# EAGLE board STorM32 NT Display v13 (EAGLE 7.5.0)
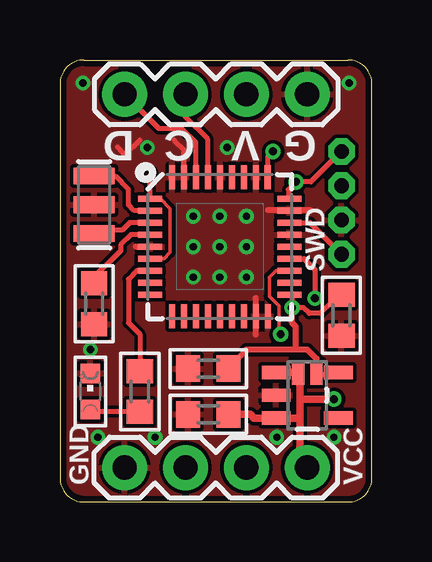
[diagram p0: board, top side]
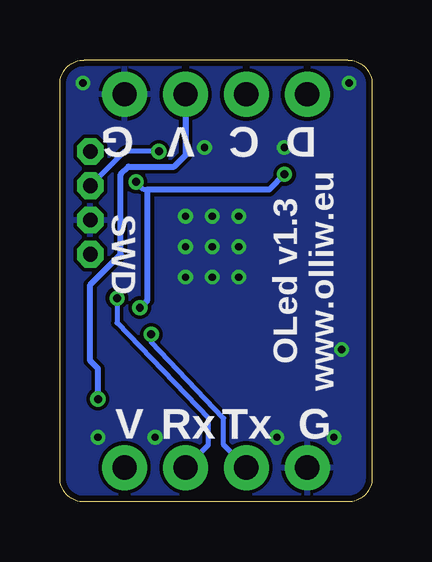
[diagram p1: board, bottom side, seen from below]

Size 13.02 x 18.41 mm. Coordinates in mm from the lower left corner, seen from the top.
Outline: 1,18.41 12.02,18.41 arc-90 13.02,17.41 13.02,1 arc-90 12.02,0 1,0 arc-90 0,1 0,17.41 arc-90 1,18.41
Copper layers (1*16): Top 0.035mm / dielectric 1.5mm / Bottom 0.035mm
Design rules "Fusion_eagle_rule_v1.1-shapes-supply-changed": minimum track width 6mil, minimum drill 12mil, track to track 6mil, track to pad 6mil, pad to pad 6mil, via to via 6mil, smd to smd 0mil, copper to edge 10mil, drill to drill 10mil, minimum pad ring 10mil, minimum via ring 6mil, stop-mask expansion 2mil, vias tented up to drill 100mil, thermal gap 6mil

## Footprints (pad centres in the part's own frame; a part is rotated, then mirrored left to right if it is on the bottom)
C0603 = smd 1 x 1.1: 1 -0.85,0; 2 0.85,0
VFQFPN36 = smd 1 x 0.25: 1 -2.9,2; 2 -2.9,1.5; 3 -2.9,1; 4 -2.9,0.5; 5 -2.9,0; 6 -2.9,-0.5; 7 -2.9,-1; 8 -2.9,-1.5; 9 -2.9,-2; 19 2.9,-2; 20 2.9,-1.5; 21 2.9,-1; 22 2.9,-0.5; 23 2.9,0; 24 2.9,0.5; 25 2.9,1; 26 2.9,1.5; 27 2.9,2 | smd 0.25 x 1: 10 -2,-2.9; 11 -1.5,-2.9; 12 -1,-2.9; 13 -0.5,-2.9; 14 0,-2.9; 15 0.5,-2.9; 16 1,-2.9; 17 1.5,-2.9; 18 2,-2.9; 29 1.5,2.9; 30 1,2.9; 31 0.5,2.9; 32 0,2.9; 33 -0.5,2.9; 34 -1,2.9; 35 -1.5,2.9; 36 -2,2.9 | smd 0.27 x 1: 28 2,2.9
SOT23-5 = smd 0.55 x 1.2: 1 -0.95,-1.3; 2 0,-1.3; 3 0.95,-1.3; 4 0.95,1.3; 5 -0.95,1.3
1X04 = drill 1.016 pad 1.88: 1 0,0; 2 2.54,0; 3 5.08,0; 4 7.62,0
4X1_1P27_OCT_BILEX = drill 0.61 pad 1.118 octagon: 1 0,0; 2 0,-1.429; 3 0,-2.857; 4 0,-4.286
CHIPLED_0603 = smd 0.8 x 0.8: A 0,-0.75; C 0,0.75
RESONATOR-SMD = smd 0.7 x 1.7: 1 -1.2,0; 2 0,0; 3 1.2,0
R0603 = smd 1 x 1.1: 1 -0.85,0; 2 0.85,0
SJ_2S-NO = smd 0.508 x 1.016: 1 -0.381,0; 2 0.381,0

## Placement (x,y rotation side)
C1  100n  [C0603]  6.19,3.65 180 top
C2  1u  [C0603]  6.19,5.56 180 top
C3  100n  [C0603]  11.75,7.78 270 top
C4  100n  [C0603]  1.43,8.26 270 top
IC1  STM32F103T8  [VFQFPN36]  6.67,10.64 0 top
IC2  TC1015-3.3VCT713  [SOT23-5]  10.32,4.45 270 top
JP1  [1X04]  10.32,1.43 180 top
JP2  SWD  [4X1_1P27_OCT_BILEX]  11.75,14.61 0 top
JP3  [1X04]  2.7,16.99 0 top
LED1  green  [CHIPLED_0603]  1.27,4.6 0 top
Q1  CSTCE8M00G55-R0  [RESONATOR-SMD]  1.43,12.38 270 top
R1  2.2k  [R0603]  3.33,4.6 270 top
SJ1  POWER  [SJ_2S-NO]  10.32,5.4 0 top

## Library data of the parts
C1-C4 R1 = rcl
IC1 = # stm32
IC2 JP1 JP3 Q1 SJ1 = # SparkFun2
JP2 = # stdlib
LED1 = led

## Nets
3.3V: C2.1 C3.1 IC1.1 IC1.6 IC1.19 IC1.27 IC2.5 JP2.1 SJ1.2
5V: C1.1 IC2.1 IC2.3 JP1.1 JP3.3 SJ1.1
GND: C1.2 C2.2 C3.2 C4.2 IC1.5 IC1.17 IC1.18 IC1.24 IC1.26 IC1.29 IC1.32 IC1.35 IC1.36 IC2.2 JP1.4 JP2.3 JP3.4 LED1.C Q1.2
LED: IC1.7 R1.1
N$1: C4.1 IC1.4
N$2: LED1.A R1.2
N$5: IC1.2 Q1.1
N$6: IC1.3 Q1.3
RX: IC1.22 JP1.2
SCL: IC1.33 JP3.2
SDA: IC1.34 JP3.1
SWCLK: IC1.28 JP2.2
SWDIO: IC1.25 JP2.4
TX: IC1.21 JP1.3

## Tracks (layer width: path | path; a pad name or v marks a point on that pad's centre or on a via)
3.3V  (via drill 0.33)
  Top 0.152: IC1.1 4.19,12.64 4.6,12.22 4.6,10.4 4.34,10.14 IC1.6
  Top 0.203: C3.1 11.34,8.32 10.87,7.86 10.4,7.86 10.16,8.1 v9.68,8.1 9.68,8.57 9.78,8.64 IC1.19 | 7.14,5.71 7.14,5.66 C2.1 | 9.78,12.64 IC1.27 9.53,12.68 9.53,13.02 v9.84,13.34 10.48,13.34 JP2.1 | IC1.1 3.77,13.54 v3.65,13.65 | 10.7,5.24 SJ1.2
  Top 0.254: SJ1.2 10.7,5.97 10.32,6.35 9.84,6.35 | 9.84,6.35 7.78,6.35 7.14,5.71 | 9.84,6.35 9.84,7.3 9.68,7.46 v9.68,8.1 | IC2.5 10.7,5.24
  Bottom 0.203: 9.37,13.02 9.53,13.02 v9.84,13.34
  Bottom 0.254: v9.68,8.1 9.37,8.41 9.37,13.02 4.29,13.02 v3.65,13.65
5V  (via drill 0.33)
  Top 0.203: IC2.1 | 10,5.33 SJ1.1 | IC2.3
  Top 0.305: IC2.3 8.09,3.5 7.94,3.65 C1.1 | IC2.1 SJ1.1 | v11.43,4.29 10,4.29 | 10,4.29 10,5.33 | JP1.1 10,1.75 10,3.49 | 10,3.49 10,4.29 | IC2.3 10,3.49
  Bottom 0.254: v11.43,4.29 11.43,5.56 11.75,5.87 11.75,9.05 10.48,10.32 10.48,13.65 10.16,13.97 8.26,13.97 7.78,14.45 JP3.3
GND  (via drill 0.3 pad 0.61)
  Top 0.152: IC1.17 8.14,7.74 8.18,7.86 | 4.6,13.53 4.61,13.7 IC1.36
  Top 0.203: 4.76,15.08 5.17,14.68 IC1.35 | 2.4,14.78 2.7,14.45 3.33,15.08
  Top 0.254: 3.17,10.64 4.13,10.64 | 10.44,12.15 8.69,12.15 | 8.18,6.99 8.18,7.86 8.18,8.49
  other vias: 6.67,11.91 5.56,11.91 7.78,9.37 7.78,10.64 7.78,11.91 5.56,9.37 6.67,9.37 6.67,10.64 5.56,10.64 1.27,6.35 1.59,2.7 11.43,2.7 0.95,17.46 12.06,17.46 3.65,14.76 6.99,14.76 9.05,2.7 3.97,2.7
  pour Bottom (isolate 0.152, rank 2): 0.33,17.48 arc-90 1,18.15 12.1,18.15 arc-90 12.77,17.48 12.77,1 arc-90 12.1,0.33 1,0.33 arc-90 0.33,1
  pour Top (isolate 0.152, rank 2): 0.33,17.48 arc-90 1,18.15 12.1,18.15 arc-90 12.77,17.48 12.77,1 arc-90 12.1,0.33 1,0.33 arc-90 0.33,1
LED
  Top 0.203: IC1.7 3.21,9.64 2.86,9.29 2.86,7.46 3.33,6.99 R1.1
N$1
  Top 0.203: IC1.4 2.96,11.14 2.54,10.72 2.54,10.48 1.27,9.21 C4.1
N$2
  Top 0.203: R1.2 1.53,3.75 LED1.A
N$5
  Top 0.203: IC1.2 3.1,12.14 2.86,12.38 2.86,13.02 2.29,13.58 Q1.1
N$6
  Top 0.203: IC1.3 2.9,11.64 2.61,11.34 1.59,11.34 1.59,11.27 Q1.3
RX  (via drill 0.33)
  Top 0.203: IC1.22 10.18,10.14 10.64,9.68 v10.64,8.49
  Bottom 0.203: v10.64,8.49 10.64,7.46 6.83,3.49 6.83,2.38 JP1.2
SCL
  Top 0.203: IC1.33 6.17,15.11 5.24,16.03 JP3.2
SDA
  Top 0.203: IC1.34 5.67,14.97 5.08,15.56 4.13,15.56 JP3.1
SWCLK  (via drill 0.33)
  Top 0.203: IC1.28 8.67,14.38 v8.89,14.61
  Bottom 0.203: v8.89,14.61 10.32,14.61 JP2.2
SWDIO
  Top 0.203: IC1.25 10.43,11.64 JP2.4
TX  (via drill 0.33)
  Top 0.152: IC1.21 9,9.64 8.73,9.37 8.73,8.57 9.13,8.18 9.13,7.06 v9.21,6.99
  Bottom 0.203: v9.21,6.99 9.21,6.67 6.19,3.49 6.19,2.38 JP1.3

## Text on the board
tNames: D | C | V | G | SWD | GND | VCC
bNames: D | C | V | G | SWD | OLed v1.3 / www.olliw.eu | G | Tx | Rx | V